# Altium PCB RHX-NYFK-PCB11V1.01_PB2X2.PcbDoc
Units mm, origin at the board's own origin, x right, y up, seen from the top; angles counter-clockwise.
Board outline 157.4 x 110 mm, 2 copper layers (Top Layer, Bottom Layer), stack 1.571 mm thick; 4 components, 0 nets, 4 pads, 0 vias.
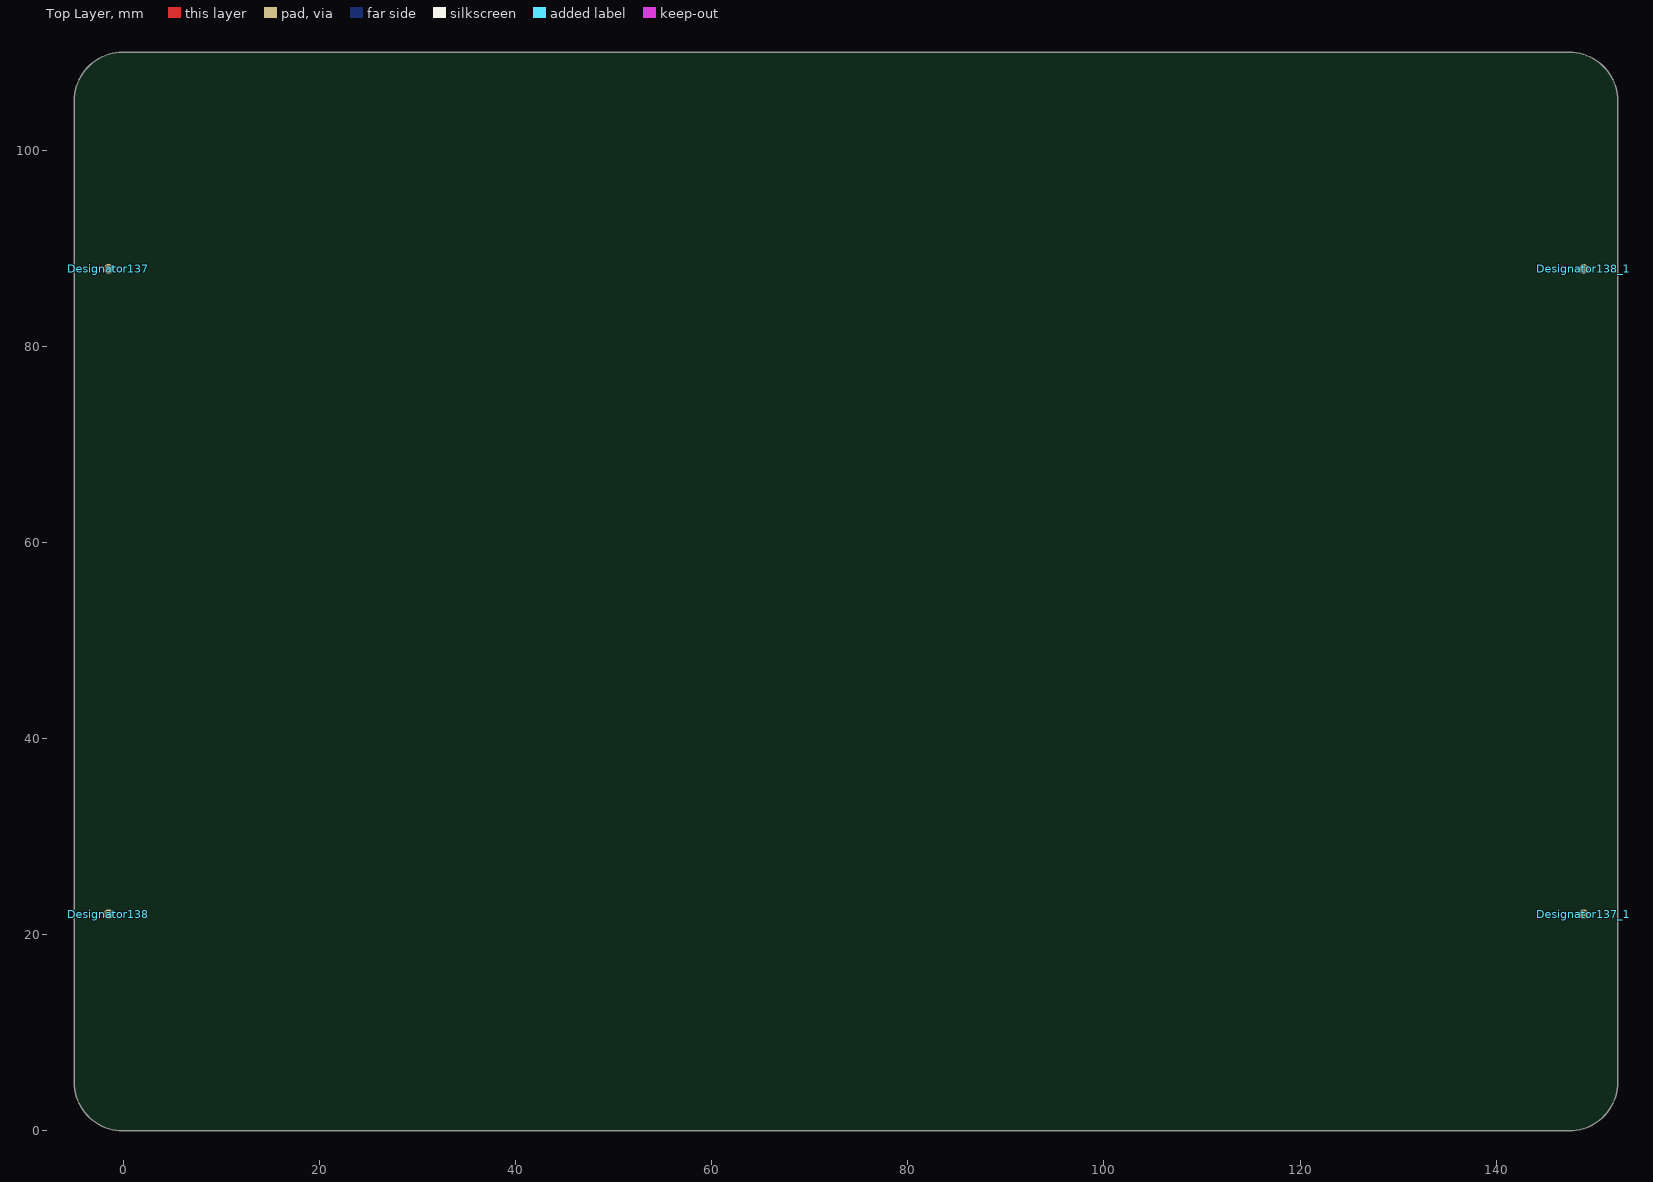
[diagram p0: Top Layer view]
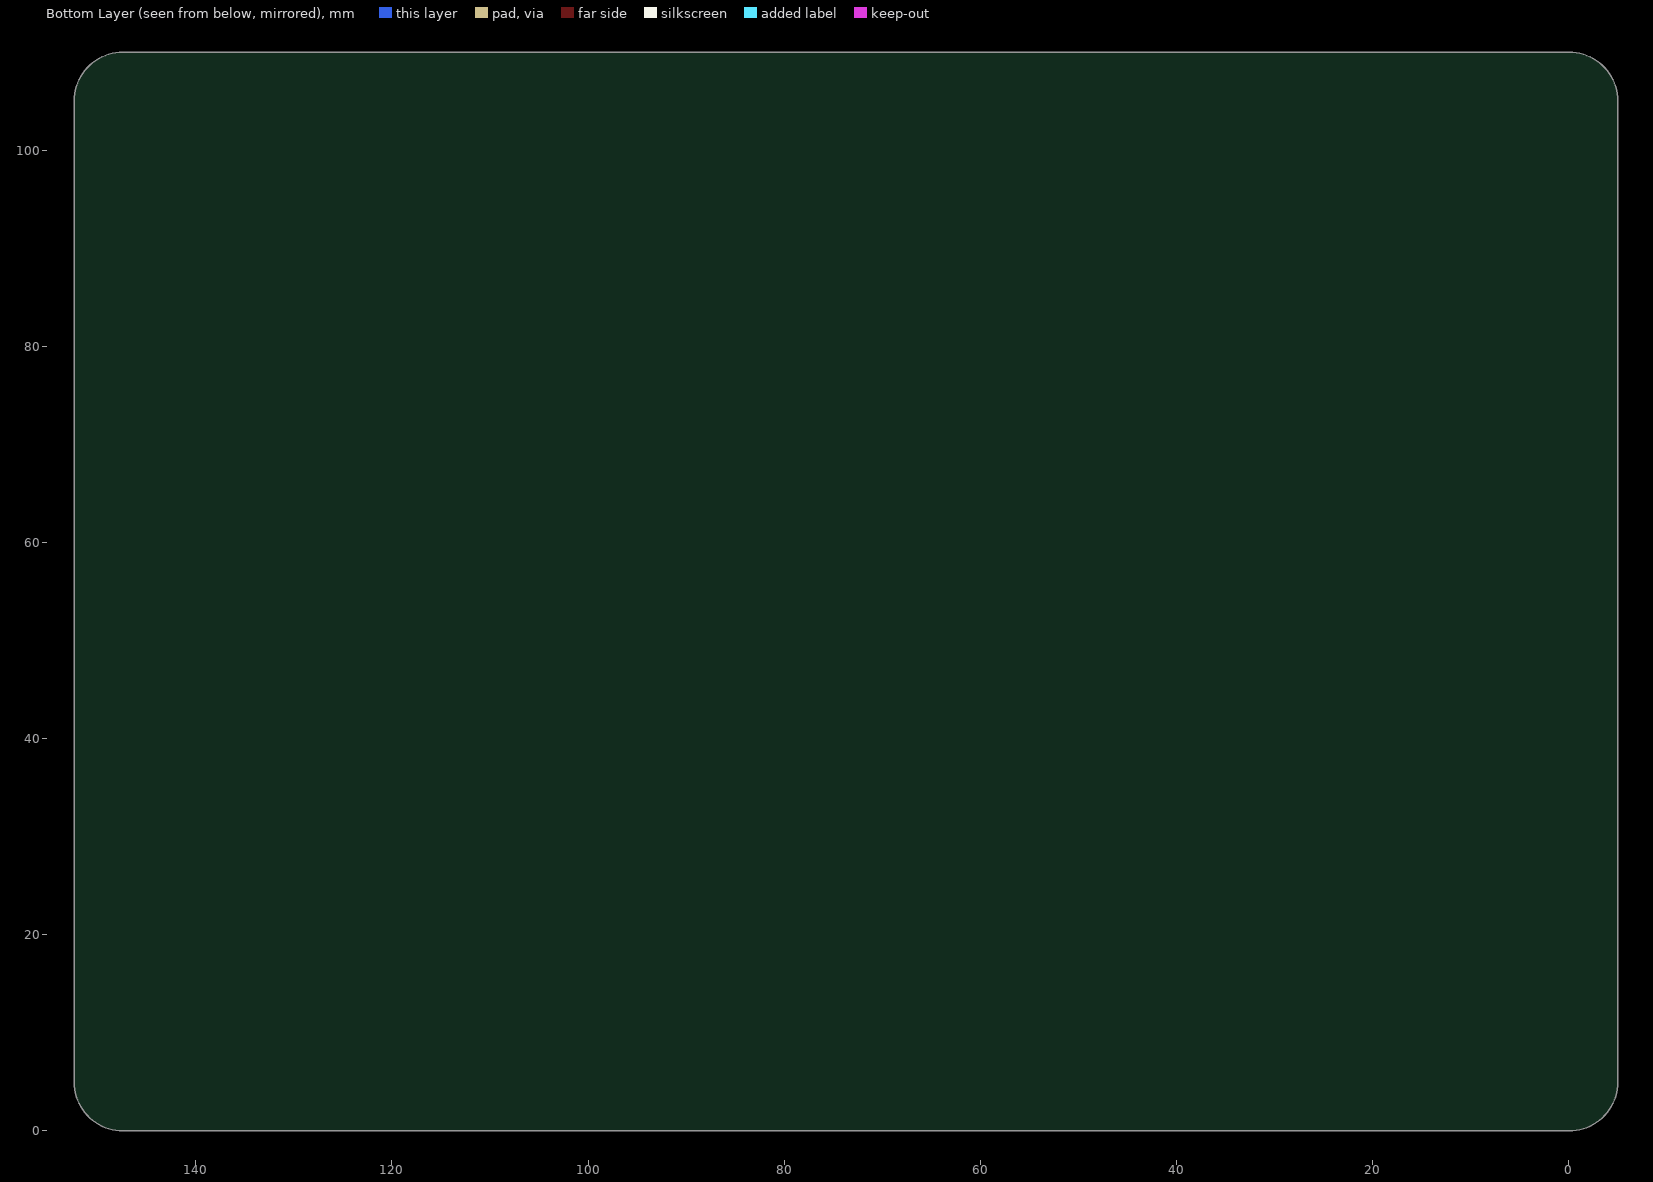
[diagram p1: Bottom Layer view, seen from below]

## Layer stack, top to bottom
Top Solder: solder mask 0.0102, Solder Resist, Dk 3.5
Top Layer: signal copper 0.0356
Dielectric 1: dielectric 1.5, FR-4, Dk 4.8
Bottom Layer: signal copper 0.0356
Bottom Solder: solder mask 0.0102, Solder Resist, Dk 3.5

## Board outline
-5,5 -5,105 cw(c0,105) 0,110 147.4,110 cw(c147.4,105) 152.4,105 152.4,5 cw(c147.4,5) 147.4,0 0,0 cw(c0,5)

## Design rules (kind name [scope] priority, off if disabled: settings)
Clearance [All] p1: gap=0.254
PolygonConnect [All] p1: connectstyle=Relief reliefconductorwidth=0.254 reliefentries=4 polygonreliefangle="90 Angle" airgapwidth=0.254
RoutingVias [All] p1: holewidth=0.711 width=1.27 viastyle="Through Hole" minholewidth=0.711 minwidth=1.27 maxholewidth=0.711 maxwidth=1.27
SolderMaskExpansion [All] p1: expansion=0.102
Width [All] p1: maxlimit=0.254 minlimit=0.254 preferedwidth=0.254
30 further rules are at their usual default settings.

## Components (designator, comment, footprint, x,y, rotation, side; value= is the part's Value field where it differs from the comment)
Designator137 "Comment" MARK_D1R0 -1.5,87.9 r0 top
Designator137_1 "Comment" MARK_D1R0 148.9,22.1 r180 top
Designator138 "Comment" MARK_D1R0 -1.5,22.1 r180 top
Designator138_1 "Comment" MARK_D1R0 148.9,87.9 r0 top

## Footprints (in the part's own frame and the unit in brackets; to place one, negate y for a bottom-side part, rotate by r counter-clockwise, add the part's x,y. Pads: shape width x height; smd on the part's side, far side on the other; paste and mask are expansions set on the pad)
MARK_D1R0 [mm]
  round 1 smd paste-0.5 mask+1: 1(0,0)
  Top Layer pour cut-out: 0,-1.5 -0.574,-1.386 -1.061,-1.061 -1.386,-0.574 -1.5,0 -1.5,0 -1.386,0.574 -1.061,1.061 -0.574,1.386 0,1.5 0,1.5 0.574,1.386 1.061,1.061 1.386,0.574 1.5,0 1.5,0 1.386,-0.574 1.061,-1.061 0.574,-1.386 0,-1.5
  Mechanical 15 keep-out circle w0.127: c0,0 r1.5
  body extent -1.5,-1.5 1.5,1.5, height 0.01

## Nets (pads, with @x,y where several pads share a name; then routed paths per layer and width w, separated by ;. In a path a pad name is that pad's centre, name@x,y a point inside that pad or via, vN(x,y) a via of type N, cw(c..) or ccw(c..) an arc to the next point about the centre after c; other vN are vias at no path point)
pads on no net: Designator137.1 Designator137_1.1 Designator138.1 Designator138_1.1

## Silkscreen, mask and mechanical layers (free items; w line width, h text height)
Mechanical 1:
  circle w0.1: c149.9,99 r1.5
  circle w0.1: c149.9,11 r1.5
  circle w0.1: c-2.5,99 r1.5
  circle w0.1: c-2.5,11 r1.5
  lines w0.1: 0,55 147.4,55 ; 73.7,0 73.7,110 ; 0,0 cw(c0,5) -5,5 -5,105 cw(c0,105) 0,110 ; 0,0 0,110 ; 0,0 147.4,0 ; 0,110 147.4,110 ; 147.4,0 ccw(c147.4,5) 152.4,5 152.4,105 ccw(c147.4,105) 147.4,110 ; 147.4,0 147.4,110
Drill Drawing:
  circle w0.254: c-5.044,132.62 r0.847
  lines w0.254: -5.891,120.344 -5.891,120.767 -5.467,121.19 -5.891,121.613 -5.891,122.037 -5.467,122.037 -5.044,121.613 -4.621,122.037 -4.197,122.037 -4.197,121.613 -4.621,121.19 -4.197,120.767 -4.197,120.344 -4.621,120.344 -5.044,120.767 -5.467,120.344 -5.891,120.344 ; -5.891,124.154 -5.044,124.577 -4.197,124.154 -4.621,125 -4.197,125.847 -5.044,125.423 -5.891,125.847 -5.467,125 -5.891,124.154 ; -5.891,127.964 -4.197,127.964 -4.197,129.657 -5.891,129.657 -5.891,127.964 ; -5.891,136.007 -5.467,136.007 -5.044,135.584 -4.621,136.007 -4.197,136.007 -4.621,136.43 -4.197,136.853 -4.621,136.853 -5.044,137.277 -5.467,136.853 -5.891,136.853 -5.467,136.43 -5.891,136.007 ; -5.891,141.087 -4.197,141.087 -5.044,139.394 -5.891,141.087 ; -5.891,143.627 -5.467,143.627 -5.467,143.204 -4.621,143.204 -4.621,143.627 -4.197,143.627 -4.197,144.473 -4.621,144.473 -4.621,144.897 -5.467,144.897 -5.467,144.473 -5.891,144.473 -5.891,143.627
  lines w0.381: -7.41,119.201 263.889,119.201 ; -7.41,145.871 263.889,145.871 ; 6.583,115.391 6.583,149.681 ; 23.088,115.391 23.088,149.681 ; 51.02,115.391 51.02,149.681 ; 63.869,115.391 63.869,149.681 ; 82.508,115.391 82.508,149.681 ; 120.597,115.391 120.597,149.681 ; 135.579,115.391 135.579,149.681 ; 154.522,115.391 154.522,149.681 ; 173.313,115.391 173.313,149.681 ; 194.998,115.391 194.998,149.681 ; 228.872,115.391 228.872,149.681 ; -7.41,115.391 263.889,115.391 263.889,149.681 -7.41,149.681 -7.41,115.391
  text "Symbol" at -5.124,147.014 h1.83
  text "Count" at 7.726,147.014 h1.83
  text "Hole Size" at 24.231,147.014 h1.83
  text "Plated" at 52.163,147.014 h1.83
  text "Hole Type" at 65.012,147.014 h1.83
  text "Drill Layer Pair" at 83.651,147.014 h1.83
  text "Via/Pad" at 121.74,147.014 h1.83
  text "Pad Shape" at 136.722,147.014 h1.83
  text "Template" at 155.665,147.014 h1.83
  text "Description" at 174.456,147.014 h1.83
  text "Hole Tolerance (+)" at 196.141,147.014 h1.83
  text "Hole Tolerance (-)" at 230.015,147.014 h1.83
  text "4" at 7.726,143.204 h1.52
  text "11.81mil (0.300mm)" at 24.231,143.204 h1.52
  text "PTH" at 52.163,143.204 h1.52
  text "Round" at 65.012,143.204 h1.52
  text "Top Layer - Bottom Layer" at 83.651,143.204 h1.52
  text "Pad" at 121.74,143.204 h1.52
  text "Rounded" at 136.722,143.204 h1.52
  text "c168h30" at 155.665,143.204 h1.52
  text "16" at 7.726,139.394 h1.52
  text "27.56mil (0.700mm)" at 24.231,139.394 h1.52
  text "PTH" at 52.163,139.394 h1.52
  text "Round" at 65.012,139.394 h1.52
  text "Top Layer - Bottom Layer" at 83.651,139.394 h1.52
  text "Pad" at 121.74,139.394 h1.52
  text "Rounded" at 136.722,139.394 h1.52
  text "c110h70" at 155.665,139.394 h1.52
  text "16" at 7.726,135.584 h1.52
  text "29.53mil (0.750mm)" at 24.231,135.584 h1.52
  text "PTH" at 52.163,135.584 h1.52
  text "Round" at 65.012,135.584 h1.52
  text "Top Layer - Bottom Layer" at 83.651,135.584 h1.52
  text "Pad" at 121.74,135.584 h1.52
  text "Rounded" at 136.722,135.584 h1.52
  text "c130h75" at 155.665,135.584 h1.52
  text "48" at 7.726,131.774 h1.52
  text "39.37mil (1.000mm)" at 24.231,131.774 h1.52
  text "PTH" at 52.163,131.774 h1.52
  text "Round" at 65.012,131.774 h1.52
  text "Top Layer - Bottom Layer" at 83.651,131.774 h1.52
  text "Pad" at 121.74,131.774 h1.52
  text "Rounded" at 136.722,131.774 h1.52
  text "c170h100" at 155.665,131.774 h1.52
  text "60" at 7.726,127.964 h1.52
  text "35.43mil (0.900mm)" at 24.231,127.964 h1.52
  text "PTH" at 52.163,127.964 h1.52
  text "Round" at 65.012,127.964 h1.52
  text "Top Layer - Bottom Layer" at 83.651,127.964 h1.52
  text "Pad" at 121.74,127.964 h1.52
  text "(Mixed)" at 136.722,127.964 h1.52
  text "(Mixed)" at 155.665,127.964 h1.52
  text "96" at 7.726,124.154 h1.52
  text "47.24mil (1.200mm)" at 24.231,124.154 h1.52
  text "PTH" at 52.163,124.154 h1.52
  text "Round" at 65.012,124.154 h1.52
  text "Top Layer - Bottom Layer" at 83.651,124.154 h1.52
  text "Pad" at 121.74,124.154 h1.52
  text "Octagonal" at 136.722,124.154 h1.52
  text "s200h120c50" at 155.665,124.154 h1.52
  text "1152" at 7.726,120.344 h1.52
  text "12.00mil (0.305mm)" at 24.231,120.344 h1.52
  text "PTH" at 52.163,120.344 h1.52
  text "Round" at 65.012,120.344 h1.52
  text "Top Layer - Bottom Layer" at 83.651,120.344 h1.52
  text "Via" at 121.74,120.344 h1.52
  text "Rounded" at 136.722,120.344 h1.52
  text "(Mixed)" at 155.665,120.344 h1.52
  text "1392 Total" at 7.726,116.534 h1.52

## Dimensions
-5,105 to 152.4,105 on Mechanical 1
147.4,110 to 147.4,0 on Mechanical 1

## Panel: embedded boards
"RHX-NYFK-PCB11V1.01.PcbDoc" at 0,0, 2 rows x 2 columns, spacing 55 x 73.7, rotation 0